# Altium PCB ChronomePCBV2.PcbDoc (part 1 of 2)
Units mil, origin at the board's own origin, x right, y up, seen from the top; angles counter-clockwise.
Board outline 8700 x 8700 mil, 2 copper layers (Top Layer, Bottom Layer); 149 components, 168 nets, 771 pads, 312 vias.
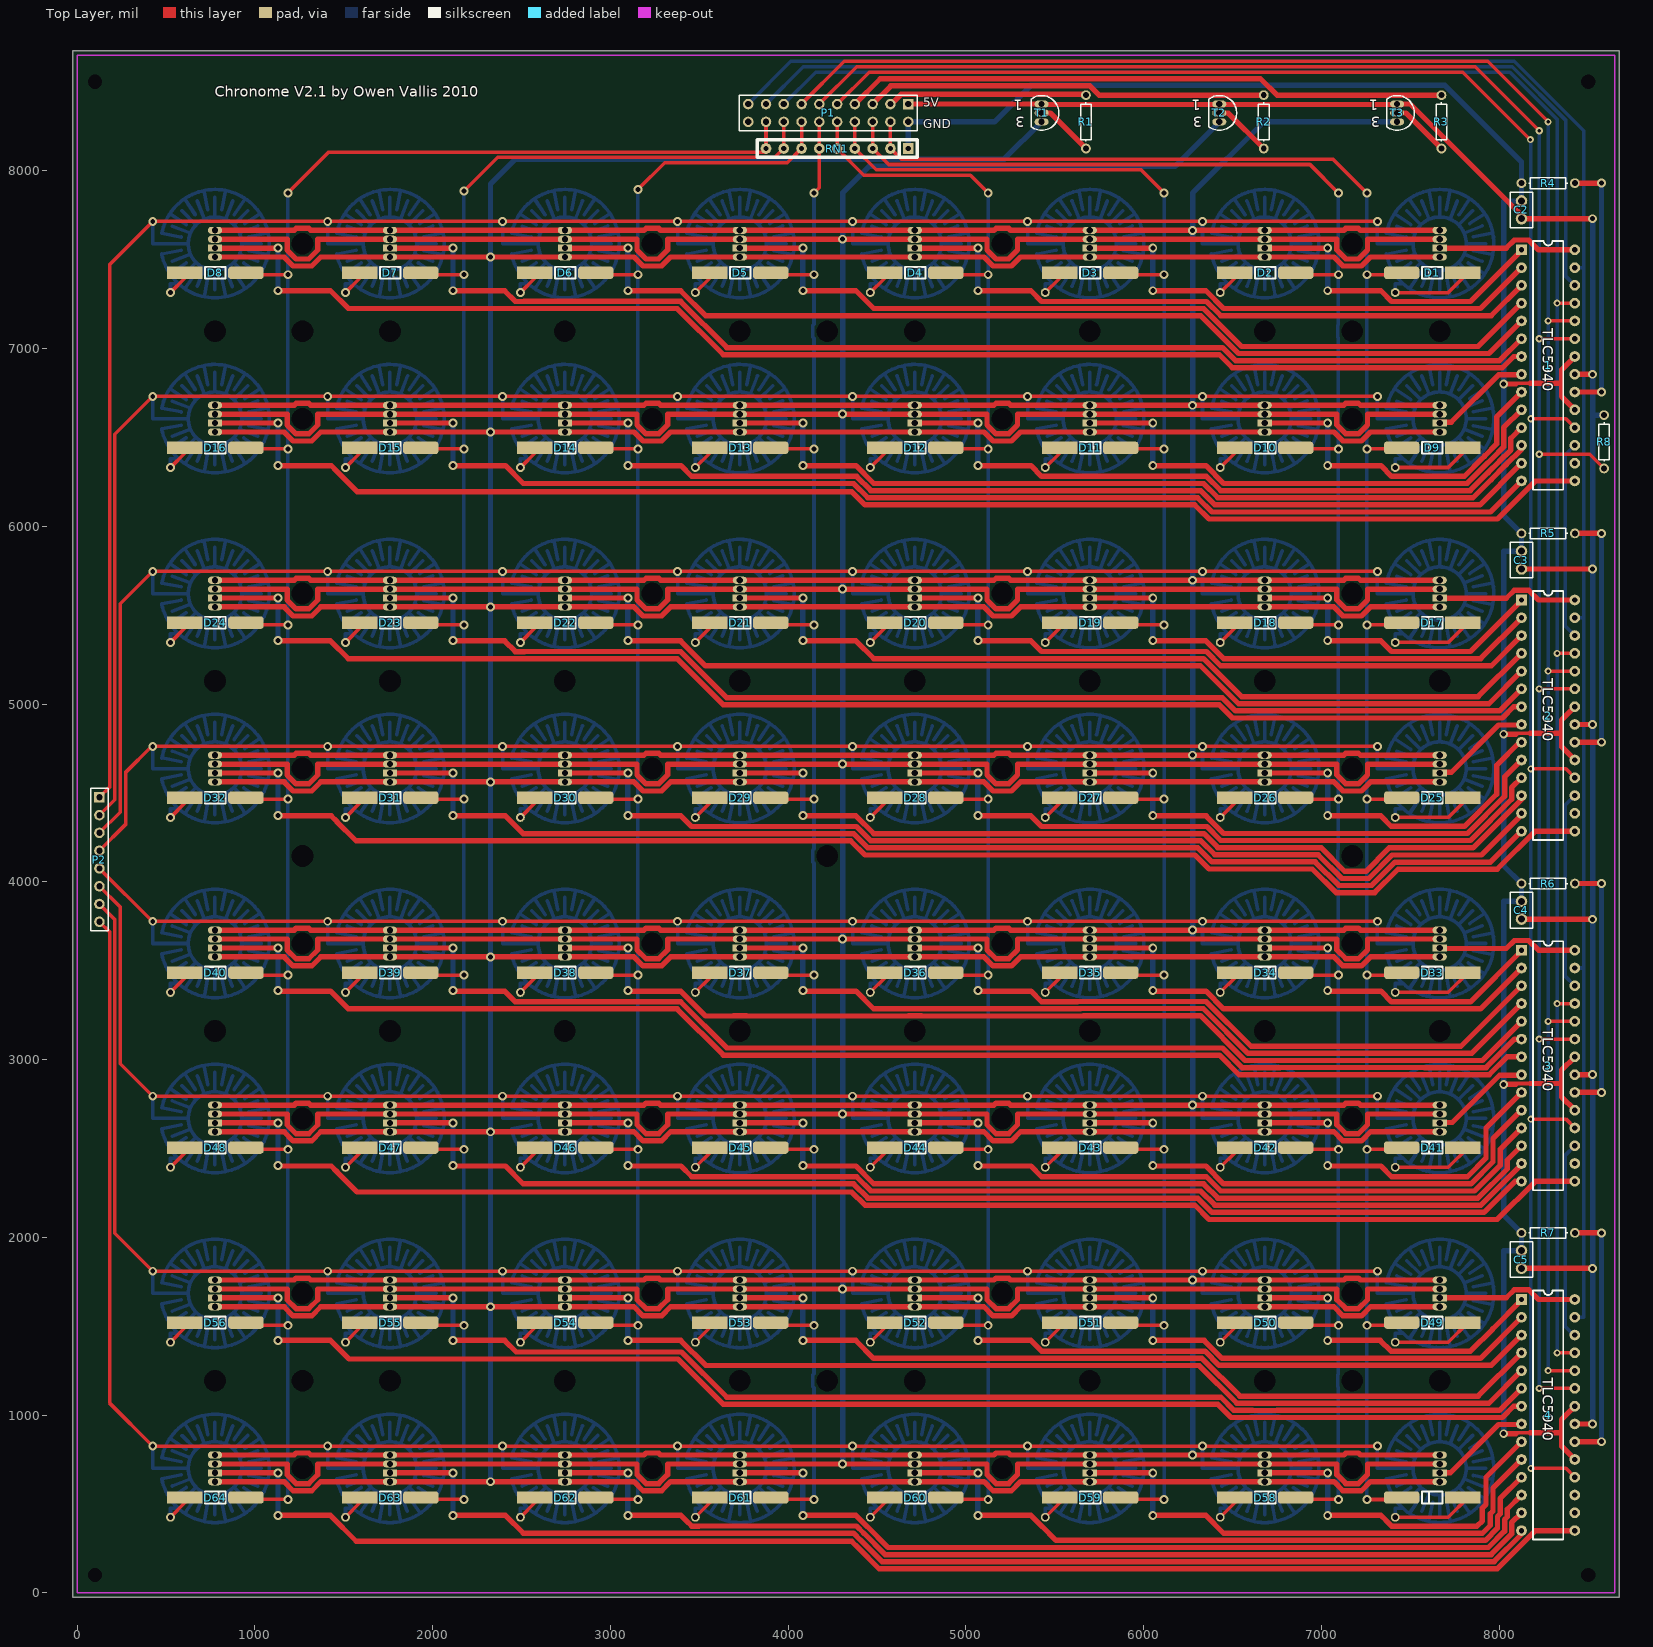
[diagram p0: Top Layer view]
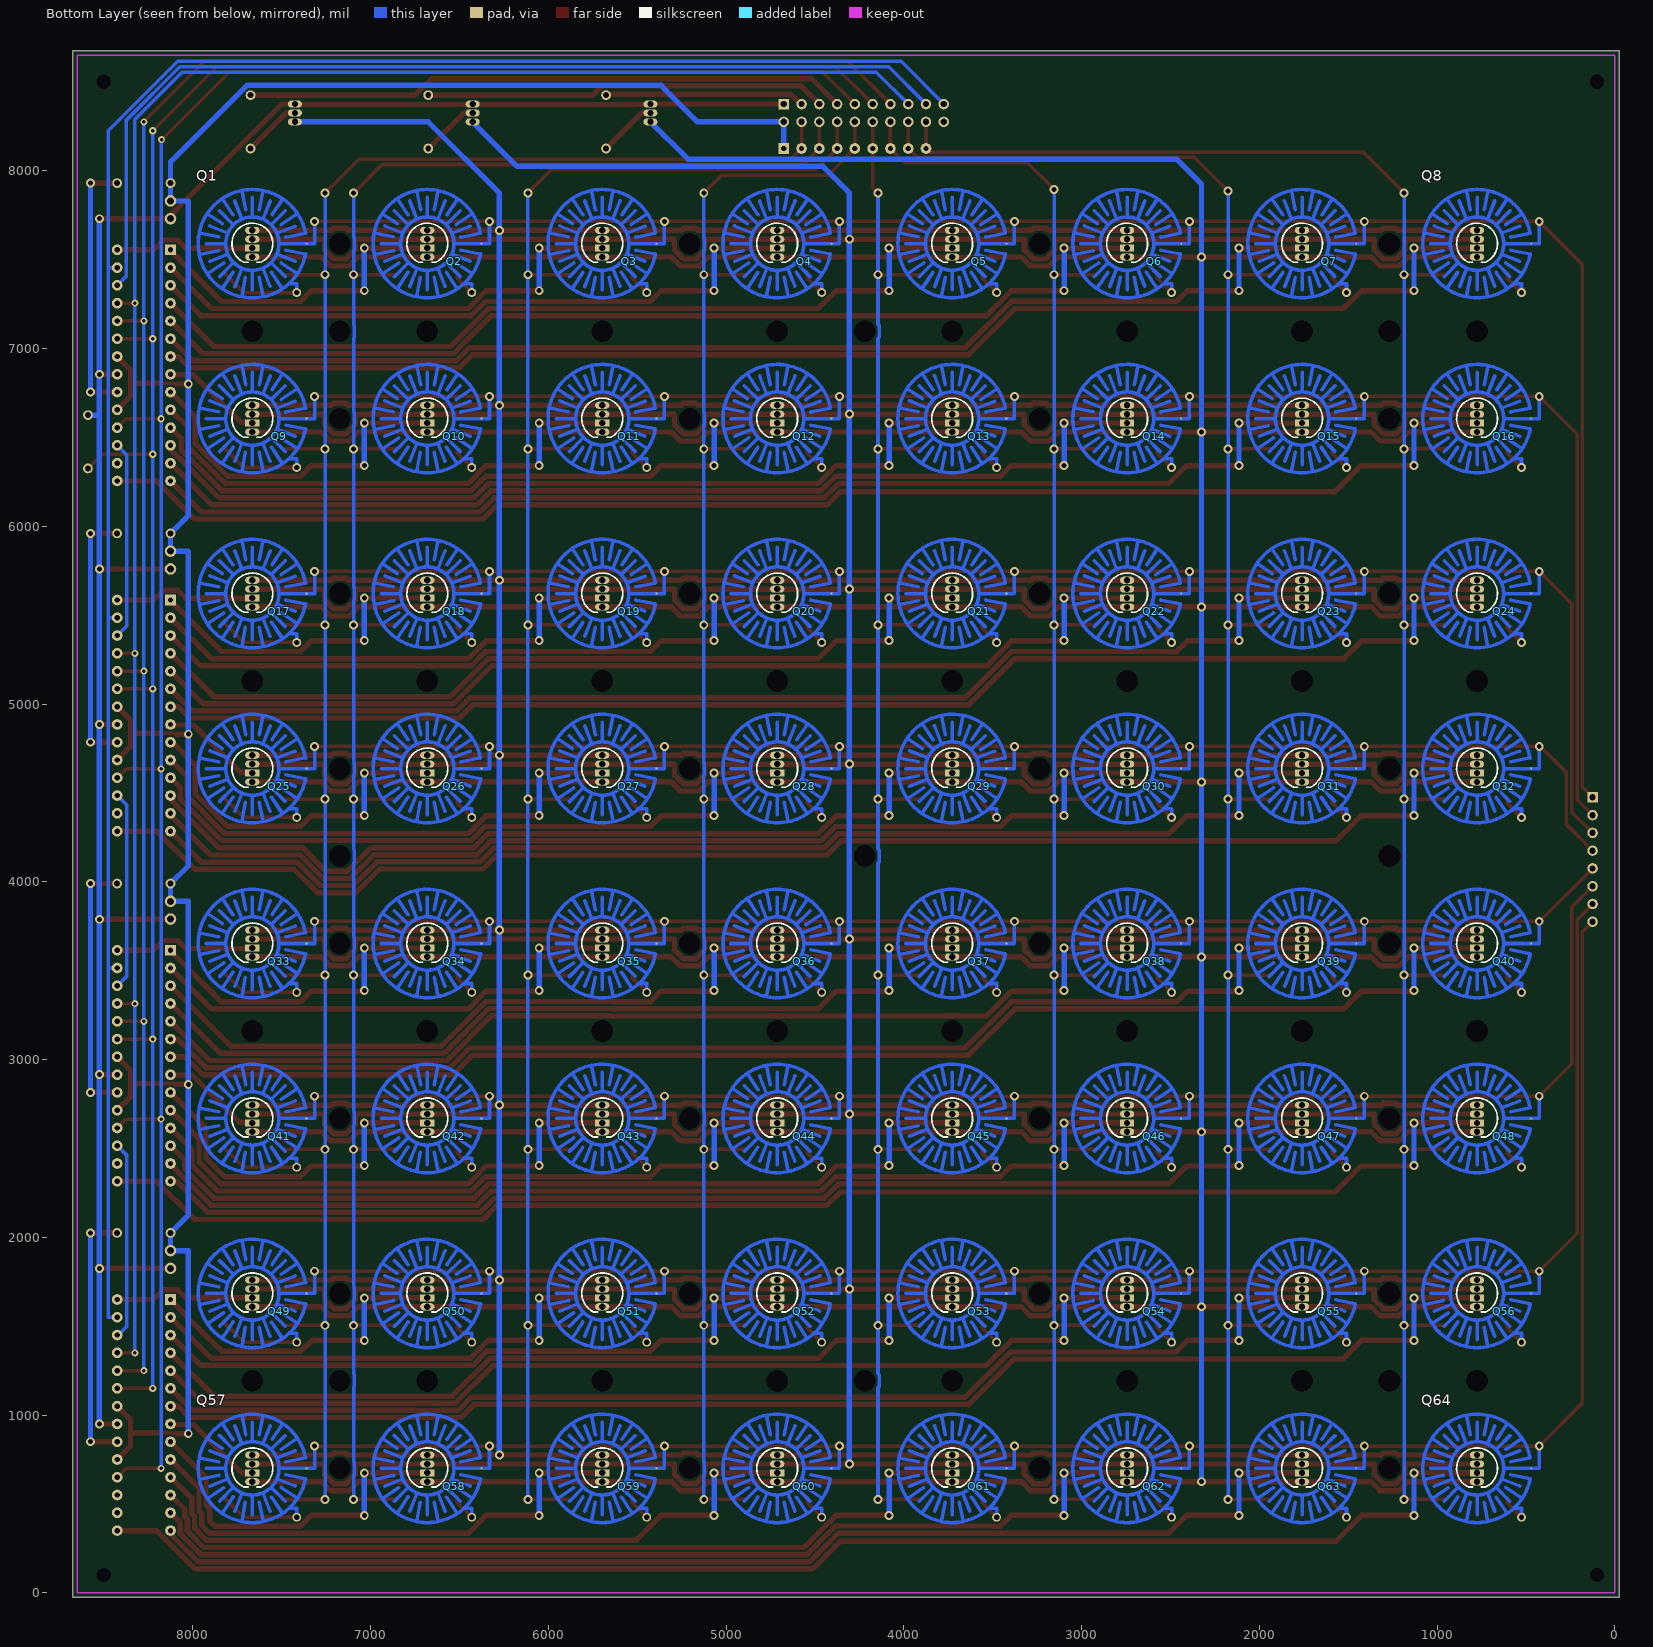
[diagram p1: Bottom Layer view, seen from below]

## Layer stack, top to bottom
Top Layer: signal copper 1.4
Dielectric: dielectric 12.6, FR-4, Dk 4.8
Bottom Layer: signal copper 1.4

## Board outline
-25,-25 8675,-25 8675,8675 -25,8675

## Design rules (kind name [scope] priority, off if disabled: settings)
Clearance [All] p1: gap=10
HoleSize [All] p1: absolutevalues=TRUE maxlimit=157.48 minlimit=1 maxpercent=80.000 minpercent=20.000
NetAntennae NetAntennae_PushButton [(HasFootprint('RGB_PUSHBUTTONV3'))] p1: netantennaetolerance=8700
NetAntennae [All] p2: netantennaetolerance=0
PolygonConnect [All] p1: connectstyle=Relief reliefconductorwidth=10 reliefentries=4 polygonreliefangle="90 Angle"
RoutingVias [All] p1: holewidth=32 width=45 viastyle="Through Hole" minholewidth=20 minwidth=40 maxholewidth=28 maxwidth=50
SilkscreenOverComponentPads [All] p1: minsilkscreentomaskgap=10
SolderMaskExpansion [All] p1: expansion=4
Width Width_RGBTraces [(InNet('BLUE') AND InNet('GREEN') AND InNet('RED'))] p1: maxlimit=50 minlimit=20 preferedwidth=25
Width [All] p2: maxlimit=50 minlimit=15 preferedwidth=15
25 further rules are at their usual default settings.

## Components (designator, comment, footprint, x,y, rotation, side; value= is the part's Value field where it differs from the comment)
1 "TLC5940" TLC5940V1 8125,7555 r0 top
2 "TLC5940" TLC5940V1 8125,5585 r0 top
3 "TLC5940" TLC5940V1 8125,3615 r0 top
4 "TLC5940" TLC5940V1 8125,1650 r0 top
C2 "Cap" CAPR2.54-5.1x3.2 8125,7780 r90 top
C3 "Cap" CAPR2.54-5.1x3.2 8125,5810 r90 top
C4 "Cap" CAPR2.54-5.1x3.2 8125,3840 r90 top
C5 "Cap" CAPR2.54-5.1x3.2 8125,1875 r90 top
D1 "DIODE" DIODESM 7625,7386.76 r180 top
D2 "DIODE" DIODESM 6680.51,7464.76 r0 top
D3 "DIODE" DIODESM 5696.26,7464.76 r0 top
D4 "DIODE" DIODESM 4712.01,7464.76 r0 top
D5 "DIODE" DIODESM 3727.76,7464.76 r0 top
D6 "DIODE" DIODESM 2743.5,7464.76 r0 top
D7 "DIODE" DIODESM 1759.25,7464.76 r0 top
D8 "DIODE" DIODESM 775,7464.76 r0 top
D9 "DIODE" DIODESM 7625,6402.51 r180 top
D10 "DIODE" DIODESM 6680.51,6480.51 r0 top
D11 "DIODE" DIODESM 5696.26,6480.51 r0 top
D12 "DIODE" DIODESM 4712.01,6480.51 r0 top
D13 "DIODE" DIODESM 3727.76,6480.51 r0 top
D14 "DIODE" DIODESM 2743.5,6480.51 r0 top
D15 "DIODE" DIODESM 1759.25,6480.51 r0 top
D16 "DIODE" DIODESM 775,6480.51 r0 top
D17 "DIODE" DIODESM 7625,5418.26 r180 top
D18 "DIODE" DIODESM 6680.51,5496.26 r0 top
D19 "DIODE" DIODESM 5696.26,5496.26 r0 top
D20 "DIODE" DIODESM 4712.01,5496.26 r0 top
D21 "DIODE" DIODESM 3727.76,5496.26 r0 top
D22 "DIODE" DIODESM 2743.5,5496.26 r0 top
D23 "DIODE" DIODESM 1759.25,5496.26 r0 top
D24 "DIODE" DIODESM 775,5496.26 r0 top
D25 "DIODE" DIODESM 7625,4434.01 r180 top
D26 "DIODE" DIODESM 6680.51,4512.01 r0 top
D27 "DIODE" DIODESM 5696.26,4512.01 r0 top
D28 "DIODE" DIODESM 4712.01,4512.01 r0 top
D29 "DIODE" DIODESM 3727.76,4512.01 r0 top
D30 "DIODE" DIODESM 2743.5,4512.01 r0 top
D31 "DIODE" DIODESM 1759.25,4512.01 r0 top
D32 "DIODE" DIODESM 775,4512.01 r0 top
D33 "DIODE" DIODESM 7625,3449.76 r180 top
D34 "DIODE" DIODESM 6680.51,3527.76 r0 top
D35 "DIODE" DIODESM 5696.26,3527.76 r0 top
D36 "DIODE" DIODESM 4712.01,3527.76 r0 top
D37 "DIODE" DIODESM 3727.76,3527.76 r0 top
D38 "DIODE" DIODESM 2743.5,3527.76 r0 top
D39 "DIODE" DIODESM 1759.25,3527.76 r0 top
D40 "DIODE" DIODESM 775,3527.76 r0 top
D41 "DIODE" DIODESM 7625,2465.5 r180 top
D42 "DIODE" DIODESM 6680.51,2543.5 r0 top
D43 "DIODE" DIODESM 5696.26,2543.5 r0 top
D44 "DIODE" DIODESM 4712.01,2543.5 r0 top
D45 "DIODE" DIODESM 3727.76,2543.5 r0 top
D46 "DIODE" DIODESM 2743.5,2543.5 r0 top
D47 "DIODE" DIODESM 1759.25,2543.5 r0 top
D48 "DIODE" DIODESM 775,2543.5 r0 top
D49 "DIODE" DIODESM 7625,1481.25 r180 top
D50 "DIODE" DIODESM 6680.51,1559.25 r0 top
D51 "DIODE" DIODESM 5696.26,1559.25 r0 top
D52 "DIODE" DIODESM 4712.01,1559.25 r0 top
D53 "DIODE" DIODESM 3727.76,1559.25 r0 top
D54 "DIODE" DIODESM 2743.5,1559.25 r0 top
D55 "DIODE" DIODESM 1759.25,1559.25 r0 top
D56 "DIODE" DIODESM 775,1559.25 r0 top
D58 "DIODE" DIODESM 6680.51,575 r0 top
D59 "DIODE" DIODESM 5696.26,575 r0 top
D60 "DIODE" DIODESM 4712.01,575 r0 top
D61 "DIODE" DIODESM 3727.76,575 r0 top
D62 "DIODE" DIODESM 2743.5,575 r0 top
D63 "DIODE" DIODESM 1759.25,575 r0 top
D64 "DIODE" DIODESM 775,575 r0 top
P1 "Header 10X2A" HDR2X10_CEN 4675,8375 r180 top
P2 "Header 8" HDR1X8 125,4475 r270 top
Q1 "PB-LEDSW" RGB_PUSHBUTTONV3 7664.76,7664.76 r180 bottom
Q2 "PB-LEDSW" RGB_PUSHBUTTONV3 6680.51,7664.76 r180 bottom
Q3 "PB-LEDSW" RGB_PUSHBUTTONV3 5696.26,7664.76 r180 bottom
Q4 "PB-LEDSW" RGB_PUSHBUTTONV3 4712.01,7664.76 r180 bottom
Q5 "PB-LEDSW" RGB_PUSHBUTTONV3 3727.76,7664.76 r180 bottom
Q6 "PB-LEDSW" RGB_PUSHBUTTONV3 2743.5,7664.76 r180 bottom
Q7 "PB-LEDSW" RGB_PUSHBUTTONV3 1759.25,7664.76 r180 bottom
Q8 "PB-LEDSW" RGB_PUSHBUTTONV3 775,7664.76 r180 bottom
Q9 "PB-LEDSW" RGB_PUSHBUTTONV3 7664.76,6680.51 r180 bottom
Q10 "PB-LEDSW" RGB_PUSHBUTTONV3 6680.51,6680.51 r180 bottom
Q11 "PB-LEDSW" RGB_PUSHBUTTONV3 5696.26,6680.51 r180 bottom
Q12 "PB-LEDSW" RGB_PUSHBUTTONV3 4712.01,6680.51 r180 bottom
Q13 "PB-LEDSW" RGB_PUSHBUTTONV3 3727.76,6680.51 r180 bottom
Q14 "PB-LEDSW" RGB_PUSHBUTTONV3 2743.5,6680.51 r180 bottom
Q15 "PB-LEDSW" RGB_PUSHBUTTONV3 1759.25,6680.51 r180 bottom
Q16 "PB-LEDSW" RGB_PUSHBUTTONV3 775,6680.51 r180 bottom
Q17 "PB-LEDSW" RGB_PUSHBUTTONV3 7664.76,5696.26 r180 bottom
Q18 "PB-LEDSW" RGB_PUSHBUTTONV3 6680.51,5696.26 r180 bottom
Q19 "PB-LEDSW" RGB_PUSHBUTTONV3 5696.26,5696.26 r180 bottom
Q20 "PB-LEDSW" RGB_PUSHBUTTONV3 4712.01,5696.26 r180 bottom
Q21 "PB-LEDSW" RGB_PUSHBUTTONV3 3727.76,5696.26 r180 bottom
Q22 "PB-LEDSW" RGB_PUSHBUTTONV3 2743.5,5696.26 r180 bottom
Q23 "PB-LEDSW" RGB_PUSHBUTTONV3 1759.25,5696.26 r180 bottom
Q24 "PB-LEDSW" RGB_PUSHBUTTONV3 775,5696.26 r180 bottom
Q25 "PB-LEDSW" RGB_PUSHBUTTONV3 7664.76,4712.01 r180 bottom
Q26 "PB-LEDSW" RGB_PUSHBUTTONV3 6680.51,4712.01 r180 bottom
Q27 "PB-LEDSW" RGB_PUSHBUTTONV3 5696.26,4712.01 r180 bottom
Q28 "PB-LEDSW" RGB_PUSHBUTTONV3 4712.01,4712.01 r180 bottom
Q29 "PB-LEDSW" RGB_PUSHBUTTONV3 3727.76,4712.01 r180 bottom
Q30 "PB-LEDSW" RGB_PUSHBUTTONV3 2743.5,4712.01 r180 bottom
Q31 "PB-LEDSW" RGB_PUSHBUTTONV3 1759.25,4712.01 r180 bottom
Q32 "PB-LEDSW" RGB_PUSHBUTTONV3 775,4712.01 r180 bottom
Q33 "PB-LEDSW" RGB_PUSHBUTTONV3 7664.76,3727.76 r180 bottom
Q34 "PB-LEDSW" RGB_PUSHBUTTONV3 6680.51,3727.76 r180 bottom
Q35 "PB-LEDSW" RGB_PUSHBUTTONV3 5696.26,3727.76 r180 bottom
Q36 "PB-LEDSW" RGB_PUSHBUTTONV3 4712.01,3727.76 r180 bottom
Q37 "PB-LEDSW" RGB_PUSHBUTTONV3 3727.76,3727.76 r180 bottom
Q38 "PB-LEDSW" RGB_PUSHBUTTONV3 2743.5,3727.76 r180 bottom
Q39 "PB-LEDSW" RGB_PUSHBUTTONV3 1759.25,3727.76 r180 bottom
Q40 "PB-LEDSW" RGB_PUSHBUTTONV3 775,3727.76 r180 bottom
Q41 "PB-LEDSW" RGB_PUSHBUTTONV3 7664.76,2743.5 r180 bottom
Q42 "PB-LEDSW" RGB_PUSHBUTTONV3 6680.51,2743.5 r180 bottom
Q43 "PB-LEDSW" RGB_PUSHBUTTONV3 5696.26,2743.5 r180 bottom
Q44 "PB-LEDSW" RGB_PUSHBUTTONV3 4712.01,2743.5 r180 bottom
Q45 "PB-LEDSW" RGB_PUSHBUTTONV3 3727.76,2743.5 r180 bottom
Q46 "PB-LEDSW" RGB_PUSHBUTTONV3 2743.5,2743.5 r180 bottom
Q47 "PB-LEDSW" RGB_PUSHBUTTONV3 1759.25,2743.5 r180 bottom
Q48 "PB-LEDSW" RGB_PUSHBUTTONV3 775,2743.5 r180 bottom
Q49 "PB-LEDSW" RGB_PUSHBUTTONV3 7664.76,1759.25 r180 bottom
Q50 "PB-LEDSW" RGB_PUSHBUTTONV3 6680.51,1759.25 r180 bottom
Q51 "PB-LEDSW" RGB_PUSHBUTTONV3 5696.26,1759.25 r180 bottom
Q52 "PB-LEDSW" RGB_PUSHBUTTONV3 4712.01,1759.25 r180 bottom
Q53 "PB-LEDSW" RGB_PUSHBUTTONV3 3727.76,1759.25 r180 bottom
Q54 "PB-LEDSW" RGB_PUSHBUTTONV3 2743.5,1759.25 r180 bottom
Q55 "PB-LEDSW" RGB_PUSHBUTTONV3 1759.25,1759.25 r180 bottom
Q56 "PB-LEDSW" RGB_PUSHBUTTONV3 775,1759.25 r180 bottom
Q57 "PB-LEDSW" RGB_PUSHBUTTONV3 7664.76,775 r180 bottom
Q58 "PB-LEDSW" RGB_PUSHBUTTONV3 6680.51,775 r180 bottom
Q59 "PB-LEDSW" RGB_PUSHBUTTONV3 5696.26,775 r180 bottom
Q60 "PB-LEDSW" RGB_PUSHBUTTONV3 4712.01,775 r180 bottom
Q61 "PB-LEDSW" RGB_PUSHBUTTONV3 3727.76,775 r180 bottom
Q62 "PB-LEDSW" RGB_PUSHBUTTONV3 2743.5,775 r180 bottom
Q63 "PB-LEDSW" RGB_PUSHBUTTONV3 1759.25,775 r180 bottom
Q64 "PB-LEDSW" RGB_PUSHBUTTONV3 775,775 r180 bottom
R1 "Res1" AXIAL-0.3 5675,8275 r270 top
R2 "Res1" AXIAL-0.3 6675,8275 r270 top
R3 "Res1" AXIAL-0.3 7675,8275 r270 top
R4 "Res1" AXIAL-0.3 8275,7930 r180 top
R5 "Res1" AXIAL-0.3 8275,5960 r180 top
R6 "Res1" AXIAL-0.3 8275,3990 r180 top
R7 "Res1" AXIAL-0.3 8275,2025 r180 top
R8 "Res1" AXIAL-0.3 8590,6475 r270 top
RN1 "100K" "9-Pin Resistor Network" 4675,8125 r270 top
T1 "PN2907A" TO-92A 5425,8325 r180 top
T2 "PN2907A" TO-92A 6425,8325 r180 top
T3 "PN2907A" TO-92A 7425,8325 r180 top

## Footprints (in the part's own frame and the unit in brackets; to place one, negate y for a bottom-side part, rotate by r counter-clockwise, add the part's x,y. Pads: shape width x height; smd on the part's side, far side on the other; paste and mask are expansions set on the pad)
"9-Pin Resistor Network" [mil] "9-Pin Resistor Network"
  rect 60x60 hole 30: 0(0,0)
  round 60 hole 30: 1(0,-100) 2(0,-200) 3(0,-300) 4(0,-400) 5(0,-500) 6(0,-600) 7(0,-700) 8(0,-800)
  silkscreen extent -50,-850 50,50
AXIAL-0.3 [mm] "Axial Device, Thru-Hole; 2 Leads; 0.3 in Pin Spacing"
  round 1.4 hole 0.85: 1(-3.81,0) 2(3.81,0)
  silkscreen extent -2.77,-0.76 2.77,0.76
CAPR2.54-5.1x3.2 [mm] "Capacitor, Ceramic, Thru-Hole, Dipped Radial; Body 5.1 x 3.2 mm (WxT) Pin Spacing 2.54 mm (typ)"
  round 1.65 hole 1: 1(-1.27,0) 2(1.27,0)
  silkscreen extent -2.55,-1.6 2.55,1.6
DIODESM [mil]
  rect 200x70 smd: 0(-169,-39)
  rrect50% 200x70 smd: 1(174,-39)
  silkscreen extent -55,-72 60,-6
HDR1X8 [mm] "Connector; Header; 8 Position"
  rect 1.5x1.5 hole 0.9: 1(0,0)
  round 1.5 hole 0.9: 2(2.54,0) 3(5.08,0) 4(7.62,0) 5(10.16,0) 6(12.7,0) 7(15.24,0) 8(17.78,0)
  silkscreen extent -1.27,-1.27 19.05,1.27
HDR2X10_CEN [mm] "Connector; Header; 10x2 Position"
  rect 1.5x1.5 hole 0.9: 1(0,0)
  round 1.5 hole 0.9: 2(2.54,0) 3(5.08,0) 4(7.62,0) 5(10.16,0) 6(12.7,0) 7(15.24,0) 8(17.78,0) 9(20.32,0) 10(22.86,0) 11(0,2.54) 12(2.54,2.54) 13(5.08,2.54) 14(7.62,2.54) 15(10.16,2.54) 16(12.7,2.54) 17(15.24,2.54) 18(17.78,2.54) 19(20.32,2.54) 20(22.86,2.54)
  silkscreen extent -1.27,-1.27 24.13,3.81
RGB_PUSHBUTTONV3 [mil] "RGB_PushButton"
  oval 80x40 hole 35: 0(0,-150) 2(0,-50) 3(0,0)
  rect 80x40 hole 35: 1(0,-100)
  rect 9.84x9.84 smd mask+0: In(305,-75)
  round 50 hole 30: Out(250,-350)
  Top Layer circle w20: c0,-75 r150
  Top Layer lines w20: 350,50 350,-75 305,-75 150,-75 ; 299.4,-133.16 188.78,-111.16 ; 299.41,-133.1 cw(c0,-75) 299.17,-15.64 ; 299.17,-15.63 188.54,-37.64 ; 251.97,92.06 162.03,31.96 ; 250,-350 250,-300 210,-300 ; 246.92,-239.62 161.6,-182.61 ; 240.62,23.37 140,-15 ; 240.3,-174.23 140,-135 ; 185.46,109.46 110,35 ; 184.93,-260.07 110,-185 ; 169.49,175.34 110.93,87.7 ; 162.59,-318.38 107.84,-236.45 ; 100,165 60,65 ; 99.74,-315.1 60,-215 ; 59.5,215.1 39.6,115.08 ; 58.39,-360.83 39.35,-265.13 ; 0,-335 0,-225 ; 0,185 0,75 ; -37.98,115.4 -57.88,215.42 ; -38.7,-265.26 -57.89,-361.75 ; -57.84,-213.95 -97.76,-315.88 ; -60,65 -99.27,165.28 ; -107.85,86.44 -167.95,176.37 ; -108.6,-235.94 -162.75,-316.99 ; -110,-185 -184.53,-260.53 ; -110,35 -185.07,109.93 ; -140,-135 -240,-175 ; -140,-15 -240.09,24.76 ; -160.85,-183.73 -246.17,-240.73 ; -168.51,37.24 -251.53,92.71 ; -190,-114.98 -290.02,-134.87 ; -190.38,-36.89 -290.4,-17 ; -260,-75 -150,-75 ; 150,-75 ccw(c0,-75) 0,75 ; 150,-75 cw(c0,-75) 0,-225 ; 0,-225 cw(c0,-75) -150,-75 ; 0,75 ccw(c0,-75) -150,-75
  silkscreen extent -115,-180 115,40
TLC5940V1 [mil] "TLC5940V1"
  rect 60x60 hole 30: 1(0,0)
  round 60 hole 30: 2(0,-100) 3(0,-200) 4(0,-300) 5(0,-400) 6(0,-500) 7(0,-600) 8(0,-700) 9(0,-800) 10(0,-900) 11(0,-1000) 12(0,-1100) 13(0,-1200) 14(0,-1300) 15(300,-1300) 16(300,-1200) 17(300,-1100) 18(300,-1000) 19(300,-900) 20(300,-800) 21(300,-700) 22(300,-600) 23(300,-500) 24(300,-400) 25(300,-300) 26(300,-200) 27(300,-100) 28(300,0)
  silkscreen extent 65,-1350 235,50
TO-92A [mm] "TO, Flat Index; 3 In-Line, Axial Leads; Body Dia. 4.5mm; Leads 0.51 x 0.48 mm (max)"
  oval 2x1 hole 0.9: 1(0,-1.27) 2(0,0) 3(0,1.27)
  silkscreen extent -2.48,-2.48 1.5,2.48

## Part data
C2 C3 C4 C5: "Capacitor"
P1: "Header, 10-Pin, Dual row"
P2: "Header, 8-Pin"
Q1 Q2 Q3 Q4 Q5 Q6 Q7 Q8 Q9 Q10 Q11 Q12 Q13 Q14 Q15 Q16 Q17 Q18 Q19 Q20 Q21 Q22 Q23 Q24 Q25 Q26 Q27 Q28 Q29 Q30 Q31 Q32 Q33 Q34 Q35 Q36 Q37 Q38 Q39 Q40 Q41 Q42 Q43 Q44 Q45 Q46 Q47 Q48 Q49 Q50 Q51 Q52 Q53 Q54 Q55 Q56 Q57 Q58 Q59 Q60 Q61 Q62 Q63 Q64: library part "Push Button", "Push Button RGB LED"
R1 R2 R3 R4 R5 R6 R7 R8: "Resistor"
RN1: library part Res1
T1 T2 T3: "PNP General Purpose Amplifier"

## Free pads (board coordinates)
  round 0 hole 122.05: 0(775,3160.63) 0(775,5129.13) 0(775,7097.64) 0(1267.13,700) 0(1267.13,1684.25) 0(1267.13,2668.5) 0(1267.13,3652.76) 0(1267.13,4637.01) 0(1267.13,5621.26) 0(1267.13,6605.51) 0(1267.13,7589.76) 1(775,1192.13) 1(1759.25,1192.13) 1(1759.25,3160.63) 1(1759.25,5129.13) 1(1759.25,7097.64) 1(2743.5,1192) 1(3235.63,700) 1(3235.63,1684.25) 1(3235.63,2668.5) 1(3235.63,3652.76) 1(3235.63,4637.01) 1(3235.63,5621.26) 1(3235.63,6605.51) 1(3235.63,7589.76) 2(1267.13,1192.13) 2(1267.13,4144.88) 2(1267.13,7097.64) 2(2743.5,3160.63) 2(2743.5,5129.13) 2(2743.5,7097.64) 2(4712.01,1192) 2(4712.01,3160.5) 2(4712.01,5129.01) 2(4712.01,7097.51) 2(5204.13,700) 2(5204.13,1684.25) 2(5204.13,2668.5) 2(5204.13,3652.76) 2(5204.13,4637.01) 2(5204.13,5621.26) 2(5204.13,6605.51) 2(5204.13,7589.76) 3(3727.76,1192.13) 3(3727.76,3160.63) 3(3727.76,5129.13) 3(3727.76,7097.64) 3(4219.88,1192.13) 3(4219.88,4144.88) 3(4219.88,7097.64) 3(6680.51,1192) 3(6680.51,3160.5) 3(6680.51,5129.01) 3(6680.51,7097.51) 3(7172.64,700) 3(7172.64,1684.25) 3(7172.64,2668.5) 3(7172.64,3652.76) 3(7172.64,4637.01) 3(7172.64,5621.26) 3(7172.64,6605.51) 3(7172.64,7589.76) 4(7172.64,1192.13) 4(7172.64,4144.88) 4(7172.64,7097.64) 5(5696.26,1192.13) 5(5696.26,3160.63) 5(5696.26,5129.13) 5(5696.26,7097.64) 7(7664.76,1192.13) 7(7664.76,3160.63) 7(7664.76,5129.13) 7(7664.76,7097.64)
  rect 200x70 smd: 0(7794,536)
  round 0 hole 80: 1(100,100) 1(100,8500) 1(8500,100) 1(8500,8500)
  rrect50% 200x70 smd: 1(7451,536)

## Via types
v1: diameter 50, hole 28, Top Layer to Bottom Layer, 292 vias
v2: diameter 40, hole 20, Top Layer to Bottom Layer, 20 vias

## Nets (pads, with @x,y where several pads share a name; then routed paths per layer and width w, separated by ;. In a path a pad name is that pad's centre, name@x,y a point inside that pad or via, vN(x,y) a via of type N, cw(c..) or ccw(c..) an arc to the next point about the centre after c; other vN are vias at no path point)
BLANK: 1.23 2.23 3.23 4.23 P1.6 R8.2 | length 12555.1
  Top Layer w20: P1.6@4175,8375 4385,8585 7865,8585 v2(8225,8225) ; v2(8225,1150) 4.23@8425,1150 ; v2(8225,3115) 3.23@8425,3115 ; v2(8225,5085) 2.23@8425,5085 ; v2(8225,6405) 8510,6405 8580,6335 R8.2@8580,6325 ; v2(8225,7055) 1.23@8425,7055
  Bottom Layer w20: v2(8225,1150) v2(8225,8225)
BLUE: P1.3 R2.1 | length 2264.3
  Top Layer w30: P1.3@4475,8375 4577.56,8477.56 5696.77,8477.56 5749.33,8425 R2.1@6675,8425
COL1: D1.1 D9.1 D17.1 D25.1 D33.1 D41.1 D49.1 P1.12 pad.1@7451,536 RN1.1 | length 12153.6
  Top Layer w20: P1.12@4575,8275 RN1.1@4575,8125 4635,8065 7065,8065 v1(7255,7875) ; v1@7260,525 pad.1@7495,525 ; v1@7260,1505 D49.1@7495,1505 ; v1@7260,2495 D41.1@7495,2495 ; v1@7260,3475 D33.1@7495,3475 ; v1@7260,4465 D25.1@7495,4465 ; v1@7260,5445 D17.1@7495,5445 ; v1@7260,6435 D9.1@7495,6435 ; v1@7260,7415 D1.1@7495,7415
  Bottom Layer w20: v1@7255,535 v1(7255,1505) v1(7255,2495) v1(7255,3475) v1(7255,4465) v1(7255,5445) v1(7255,6435) v1(7255,7415) v1(7255,7875)
  other v1: 7255,525
COL2: D2.1 D10.1 D18.1 D26.1 D34.1 D42.1 D50.1 D58.1 P1.13 RN1.2 | length 12124.4
  Top Layer w20: P1.13@4475,8275 RN1.2@4475,8125 4565,8035 6935,8035 v1(7095,7875) ; D50.1@6855,1505 v1@7090,1505 ; D42.1@6855,2495 v1@7090,2495 ; D34.1@6855,3475 v1@7090,3475 ; D26.1@6855,4465 v1@7090,4465 ; D18.1@6855,5445 v1@7090,5445 ; D10.1@6855,6435 v1@7090,6435 ; D2.1@6855,7415 v1@7090,7415 ; D58.1@6859,526 v1@7094,526
  Bottom Layer w20: v1@7095,535 7095,663.05 7091.61,666.44 7091.61,733.56 7095,736.95 7095,1155.18 7091.61,1158.56 7091.61,1225.69 7095,1229.07 v1(7095,1505) 7095,1647.31 7091.61,1650.69 7091.61,1717.81 7095,1721.2 v1(7095,2495) 7095,2631.56 7091.61,2634.94 7091.61,2702.06 7095,2705.45 v1(7095,3475) 7095,3615.81 7091.61,3619.19 7091.61,3686.32 7095,3689.7 7095,4107.94 7091.61,4111.32 7091.61,4178.44 7095,4181.83 v1(7095,4465) 7095,4600.06 7091.61,4603.45 7091.61,4670.57 7095,4673.95 v1(7095,5445) 7095,5584.31 7091.61,5587.7 7091.61,5654.82 7095,5658.21 v1(7095,6435) 7095,6568.57 7091.61,6571.95 7091.61,6639.07 7095,6642.46 7095,7060.69 7091.61,7064.08 7091.61,7131.2 7095,7134.58 v1(7095,7415) 7095,7552.82 7091.61,7556.2 7091.61,7623.33 7095,7626.71 v1(7095,7875)
  other v1: 7095,525
COL3: D3.1 D11.1 D19.1 D27.1 D35.1 D43.1 D51.1 D59.1 P1.14 RN1.3 | length 11213.6
  Top Layer w20: P1.14@4375,8275 RN1.3@4375,8125 4495,8005 5985,8005 v1(6115,7875) ; D51.1@5875,1505 v1@6110,1505 ; D43.1@5875,2495 v1@6110,2495 ; D35.1@5875,3475 v1@6110,3475 ; D27.1@5875,4465 v1@6110,4465 ; D19.1@5875,5445 v1@6110,5445 ; D11.1@5875,6435 v1@6110,6435 ; D3.1@5875,7415 v1@6110,7415 ; D59.1@5879,526 v1@6114,526
  Bottom Layer w20: v1@6115,535 v1(6115,1505) v1(6115,2495) v1(6115,3475) v1(6115,4465) v1(6115,5445) v1(6115,6435) v1(6115,7415) v1(6115,7875)
  other v1: 6115,525
COL4: D4.1 D12.1 D20.1 D28.1 D36.1 D44.1 D52.1 D60.1 P1.15 RN1.4 | length 10336.1
  Top Layer w20: P1.15@4275,8275 RN1.4@4275,8125 4425,7975 5025,7975 v1(5125,7875) ; D52.1@4885,1505 v1@5120,1505 ; D44.1@4885,2495 v1@5120,2495 ; D36.1@4885,3475 v1@5120,3475 ; D28.1@4885,4465 v1@5120,4465 ; D20.1@4885,5445 v1@5120,5445 ; D12.1@4885,6435 v1@5120,6435 ; D4.1@4885,7415 v1@5120,7415 ; D60.1@4889,526 v1@5124,526
  Bottom Layer w20: v1@5125,535 5125,664.55 5123.11,666.44 5123.11,733.56 5125,735.45 v1(5125,1505) 5125,1648.8 5123.11,1650.69 5123.11,1717.81 5125,1719.7 v1(5125,2495) 5125,2633.05 5123.11,2634.94 5123.11,2702.06 5125,2703.95 v1(5125,3475) 5125,3617.31 5123.11,3619.19 5123.11,3686.32 5125,3688.21 v1(5125,4465) 5125,4601.56 5123.11,4603.45 5123.11,4670.57 5125,4672.46 v1(5125,5445) 5125,5585.81 5123.11,5587.7 5123.11,5654.82 5125,5656.71 v1(5125,6435) 5125,6570.06 5123.11,6571.95 5123.11,6639.07 5125,6640.96 v1(5125,7415) 5125,7554.31 5123.11,7556.2 5123.11,7623.33 5125,7625.21 v1(5125,7875)
  other v1: 5125,525
COL5: D5.1 D13.1 D21.1 D29.1 D37.1 D45.1 D53.1 D61.1 P1.16 RN1.5 | length 9657.7
  Top Layer w20: D53.1@3905,1505 v1@4140,1505 ; D45.1@3905,2495 v1@4140,2495 ; D37.1@3905,3475 v1@4140,3475 ; D29.1@3905,4465 v1@4140,4465 ; D21.1@3905,5445 v1@4140,5445 ; D13.1@3905,6435 v1@4140,6435 ; D5.1@3905,7415 v1@4140,7415 ; D61.1@3909,526 v1@4144,526 ; v1(4145,7875) 4175,7905 RN1.5@4175,8125 P1.16@4175,8275
  Bottom Layer w20: v1(4145,525) 4145,1152.42 4138.86,1158.56 4138.86,1225.69 4145,1231.83 v1(4145,1505) v1(4145,2495) v1(4145,3475) 4145,4105.18 4138.86,4111.32 4138.86,4178.44 4145,4184.58 v1(4145,4465) v1(4145,5445) v1(4145,6435) 4145,7057.94 4138.86,7064.08 4138.86,7131.2 4145,7137.34 v1(4145,7415) v1(4145,7875)
COL6: D6.1 D14.1 D22.1 D30.1 D38.1 D46.1 D54.1 D62.1 P1.17 RN1.6 | length 10408.1
  Top Layer w20: D54.1@2915,1505 v1@3150,1505 ; D46.1@2915,2495 v1(3154.61,2495) ; D38.1@2917.5,3475 v1@3150,3475 ; D30.1@2917.5,4465 v1@3150,4465 ; D22.1@2917.5,5445 v1@3150,5445 ; D14.1@2917.5,6435 v1@3150,6435 ; D6.1@2917.5,7415 v1@3150,7415 ; D62.1@2919,526 v1@3154.61,526 ; v1(3155,7895) 3305,8045 3995,8045 RN1.6@4075,8125 P1.17@4075,8275
  Bottom Layer w20: v1(3154.61,525) v1(3154.61,2495) 3154.61,7894.61 v1(3155,7895)
  other v1: 3155,1505 3155,3475 3155,4465 3155,5445 3155,6435 3155,7415
COL7: D7.1 D15.1 D23.1 D31.1 D39.1 D47.1 D55.1 D63.1 P1.18 RN1.7 | length 11289.4
  Top Layer w20: D55.1@1935,1505 v1@2170,1505 ; D47.1@1935,2495 v1@2170,2495 ; D39.1@1935,3475 v1@2170,3475 ; D31.1@1935,4465 v1@2170,4465 ; D23.1@1935,5445 v1@2170,5445 ; D15.1@1935,6435 v1@2170,6435 ; D7.1@1935,7415 v1@2170,7415 ; D63.1@1939,526 v1@2174,526 ; v1(2175,7885) 2365,8075 3925,8075 RN1.7@3975,8125 P1.18@3975,8275
  Bottom Layer w20: v1(2175,525) v1(2175,1505) v1(2175,2495) v1(2175,3475) v1(2175,4465) v1(2175,5445) v1(2175,6435) v1(2175,7415) v1(2175,7885)
COL8: D8.1 D16.1 D24.1 D32.1 D40.1 D48.1 D56.1 D64.1 P1.19 RN1.8 | length 12157.3
  Top Layer w20: D64.1@949,526 v1@1184,526 ; D56.1@949,1505 v1@1180,1505 ; D48.1@949,2495 v1@1180,2495 ; D40.1@949,3475 v1@1180,3475 ; D32.1@949,4465 v1@1180,4465 ; D24.1@949,5445 v1@1180,5445 ; D16.1@949,6435 v1@1180,6435 ; D8.1@949,7415 v1@1180,7415 ; v1(1185,7875) 1415,8105 3875,8105 P1.19@3875,8275
  Bottom Layer w20: v1(1185,525) v1(1185,1505) v1(1185,2495) v1(1185,3475) v1(1185,4465) v1(1185,5445) v1(1185,6435) v1(1185,7415) v1(1185,7875)
GND: 1.19 1.22 2.19 2.22 3.19 3.22 4.19 4.22 C2.2 C3.2 C4.2 C5.2 P1.11 R4.2 R5.2 R6.2 R7.2 RN1.0 | length 14277.9
  Top Layer w20: 8092.22,6800 8097.22,6805 8175,6805 ; 8097.22,900 8175,900 ; 8097.22,2865 8175,2865 ; 8097.22,4835 8175,4835
  Top Layer w30: v1(8025,895) 8092.22,895 ; v1(8025,2860) 8092.22,2860 ; v1(8025,4830) 8092.22,4830 ; v1(8025,6800) 8092.22,6800 ; 8175,900 8350,900 ; 8175,2865 8350,2865 ; 8175,4835 8350,4835 ; 8175,6805 8350,6805 ; 4.19@8425,750 8350,825 8350,900 ; 4.22@8425,1050 8350,975 8350,900 ; 3.19@8425,2715 8350,2790 8350,2865 ; 3.22@8425,3015 8350,2940 8350,2865 ; 2.19@8425,4685 8350,4760 8350,4835 ; 2.22@8425,4985 8350,4910 8350,4835 ; 1.19@8425,6655 8350,6730 8350,6805 ; 1.22@8425,6955 8350,6880 8350,6805
  Bottom Layer w30: RN1.0@4675,8125 P1.11@4675,8275 5160,8275 5365,8480 7695,8480 8125,8050 R4.2@8125,7930 C2.2@8125,7830 8025,7830 v1(8025,6800) 8025,6060 R5.2@8125,5960 C3.2@8125,5860 8025,5860 8025,4090 R6.2@8125,3990 C4.2@8125,3890 8025,3890 8025,2125 R7.2@8125,2025 C5.2@8125,1925 8025,1925 v1(8025,895)
GREEN: P1.4 R3.1 | length 3397.4
  Top Layer w30: P1.4@4375,8375 4517.56,8517.56 6656.77,8517.56 6749.33,8425 R3.1@7675,8425
GSCLK: 1.18 2.18 3.18 4.18 P1.5 | length 12683.8
  Top Layer w20: P1.5@4270,8380 4280,8380 4455,8555 7795,8555 v2(8175,8175) ; v2(8177.48,700) 8375,700 4.18@8425,650 ; v2(8177.48,2665) 8375,2665 3.18@8425,2615 ; v2(8177.48,4635) 8375,4635 2.18@8425,4585 ; v2(8177.48,6605) 8375,6605 1.18@8425,6555
  Bottom Layer w20: v2(8175,8175) 8177.48,8172.52 v2(8177.48,700)
"LED GND 1": 1.28 Q1.1 | length 801.8
  Top Layer w30: Q1.1@7664.76,7564.76 8039.41,7564.76 8084.64,7610 8165.36,7610 8220.36,7555 1.28@8425,7555
"LED GND 2": 1.1 Q2.1 | length 1831.2
  Top Layer w30: Q2.1@6680.51,7564.76 v1(7035,7564.76) ; v1(7035,7325) 7333.82,7325 7394.05,7264.76 7837.87,7264.76 8125,7551.9 1.1@8125,7555
  Bottom Layer w30: v1(7035,7325) v1(7035,7564.76)
"LED GND 3": 1.2 Q3.1 | length 2805.4
  Top Layer w30: Q3.1@5696.26,7564.76 v1(6050.75,7564.76) ; v1(6050.75,7325) 6349.57,7325 6449.8,7224.76 7894.76,7224.76 1.2@8125,7455
  Bottom Layer w30: v1(6050.75,7325) v1(6050.75,7564.76)
"LED GND 4": 1.3 Q4.1 | length 3781.4
  Top Layer w30: Q4.1@4712.01,7564.76 v1(5066.5,7564.76) ; v1(5066.5,7325) 5365.31,7325 5425.55,7264.76 6353.23,7264.76 6433.23,7184.76 7954.76,7184.76 1.3@8125,7355
  Bottom Layer w30: v1(5066.5,7325) v1(5066.5,7564.76)
"LED GND 5": 1.4 Q5.1 | length 4867.7
  Top Layer w30: Q5.1@3727.76,7564.76 v1(4082.24,7564.76) ; v1(4082.24,7325) 4381.06,7325 4481.3,7224.76 6336.66,7224.76 6549.94,7011.49 7881.49,7011.49 1.4@8125,7255
  Bottom Layer w30: v1(4082.24,7325) v1(4082.24,7564.76)
"LED GND 6": 1.5 Q6.1 | length 5843.7
  Top Layer w30: Q6.1@2743.5,7564.76 v1(3097.99,7564.76) ; v1(3097.99,7325) 3395,7325 3536.34,7183.66 6321.2,7183.66 6533.37,6971.49 7941.49,6971.49 1.5@8125,7155
  Bottom Layer w30: v1(3097.99,7325) v1(3097.99,7564.76)
"LED GND 7": 1.6 Q7.1 | length 6819.9
  Top Layer w30: Q7.1@1759.25,7564.76 v1(2113.74,7564.76) ; v1(2113.74,7325) 2405,7325 2465.24,7264.76 2514.21,7264.76 2514.45,7265 3395,7265 3655,7005 6443.29,7005 6516.8,6931.49 8001.49,6931.49 1.6@8125,7055
  Bottom Layer w30: v1(2113.74,7325) v1(2113.74,7564.76)
"LED GND 8": 1.7 Q8.1 | length 7795.8
  Top Layer w30: Q8.1@775,7564.76 v1(1129.49,7564.76) ; v1(1129.49,7325) 1425,7325 1525.24,7224.76 2530.78,7224.76 2531.02,7225 3375,7225 3635,6965 6425,6965 6498.51,6891.49 8018.06,6891.49 8081.57,6955 1.7@8125,6955
  Bottom Layer w30: v1(1129.49,7325) v1(1129.49,7564.76)
"LED GND 9": 1.8 Q9.1 | length 573.9
  Top Layer w30: Q9.1@7664.76,6580.51 7669.76,6585.51 7729.76,6585.51 7995.74,6851.49 8121.49,6851.49 1.8@8125,6855
"LED GND 10": 1.9 Q10.1 | length 1995.3
  Top Layer w30: Q10.1@6680.51,6580.51 v1(7035,6580.51) ; v1(7035,6340.75) 7333.82,6340.75 7394.05,6280.51 7803.02,6280.51 7904.02,6381.51 7904.36,6381.51 7919,6396.16 7919,6396.49 7985,6462.49 7985,6615 1.9@8125,6755
  Bottom Layer w30: v1(7035,6340.75) v1(7035,6580.51)
"LED GND 11": 1.10 Q11.1 | length 2945.8
  Top Layer w30: Q11.1@5696.26,6580.51 v1(6050.75,6580.51) ; v1(6050.75,6340.75) 6349.57,6340.75 6449.8,6240.51 7819.59,6240.51 7920.59,6341.51 7920.92,6341.51 7959,6379.59 7959,6379.92 8025,6445.92 8025,6555 1.10@8125,6655
  Bottom Layer w30: v1(6050.75,6340.75) v1(6050.75,6580.51)
"LED GND 12": 1.11 Q12.1 | length 3896.3
  Top Layer w30: Q12.1@4712.01,6580.51 v1(5066.5,6580.51) ; v1(5066.5,6340.75) 5365.31,6340.75 5425.55,6280.51 6353.23,6280.51 6433.23,6200.51 7836.16,6200.51 7937.16,6301.51 7937.49,6301.51 7999,6363.02 7999,6363.35 8065,6429.35 8065,6495 1.11@8125,6555
  Bottom Layer w30: v1(5066.5,6340.75) v1(5066.5,6580.51)
"LED GND 13": 1.12 Q13.1 | length 4846.9
  Top Layer w30: Q13.1@3727.76,6580.51 v1(4082.24,6580.51) ; v1(4082.24,6340.75) 4381.06,6340.75 4481.3,6240.51 6336.66,6240.51 6416.66,6160.51 7852.73,6160.51 7953.73,6261.51 7954.06,6261.51 8039,6346.45 8039,6346.78 8125,6432.78 1.12@8125,6455
  Bottom Layer w30: v1(4082.24,6340.75) v1(4082.24,6580.51)
"LED GND 14": 1.13 Q14.1 | length 5815.5
  Top Layer w30: Q14.1@2743.5,6580.51 v1(3097.99,6580.51) ; v1(3097.99,6340.75) 3396.81,6340.75 3457.05,6280.51 4384.73,6280.51 4464.73,6200.51 6320.1,6200.51 6400.1,6120.51 7890.51,6120.51 8115,6345 1.13@8135,6345
  Bottom Layer w30: v1(3097.99,6340.75) v1(3097.99,6580.51)
"LED GND 15": 1.14 Q15.1 | length 6785.6
  Top Layer w30: Q15.1@1759.25,6580.51 v1(2113.74,6580.51) ; v1(2113.74,6340.75) 2409.25,6340.75 2509.49,6240.51 4368.16,6240.51 4448.16,6160.51 6303.53,6160.51 6383.53,6080.51 7950.51,6080.51 1.14@8125,6255
  Bottom Layer w30: v1(2113.74,6340.75) v1(2113.74,6580.51)
"LED GND 16": 1.15 Q16.1 | length 8104.5
  Top Layer w30: Q16.1@775,6580.51 v1(1129.49,6580.51) ; v1(1129.49,6340.75) 1429.25,6340.75 1459.25,6310.75 1459.25,6309.8 1574.05,6195 4357.1,6195 4431.59,6120.51 6286.96,6120.51 6366.96,6040.51 7989.92,6040.51 8150,6200.59 8150,6202.22 8202.78,6255 1.15@8425,6255
  Bottom Layer w30: v1(1129.49,6340.75) v1(1129.49,6580.51)
"LED GND 17": 2.28 Q17.1 | length 801.8
  Top Layer w30: Q17.1@7664.76,5594.76 8039.41,5594.76 8084.64,5640 8165.36,5640 8220.36,5585 2.28@8425,5585
"LED GND 18": 2.1 Q18.1 | length 1829.7
  Top Layer w30: Q18.1@6680.51,5596.26 v1(7035,5596.26) ; v1@7035,5355 7333.82,5355 7393.82,5295 7595.84,5295 7595.99,5295.16 7733.53,5295.16 7733.69,5295 7838.1,5295 2.1@8125,5581.9 ; 2.1@8125,5583.39 2.1@8125,5585
  Bottom Layer w30: v1(7035,5356.5) v1(7035,5596.26)
"LED GND 19": 2.2 Q19.1 | length 2805.4
  Top Layer w30: Q19.1@5696.26,5596.26 v1(6050.75,5596.26) ; v1@6050.75,5355 6349.57,5355 6449.57,5255 6628.28,5255 ; 6628.31,5255.03 6732.71,5255.03 ; 6732.74,5255 7612.41,5255 7612.56,5255.16 7716.96,5255.16 7717.12,5255 7895,5255 2.2@8125,5485
  Bottom Layer w30: v1(6050.75,5356.5) v1(6050.75,5596.26)
"LED GND 20": 2.3 Q20.1 | length 3781.4
  Top Layer w30: Q20.1@4712.01,5596.26 v1(5066.5,5596.26) ; v1@5066.5,5355 5365.31,5355 5425.31,5295 5627.33,5295 5627.49,5295.16 6352.84,5295.16 6433,5215 6644.85,5215 ; 6644.88,5215.03 6716.14,5215.03 ; 6716.18,5215 7628.97,5215 7629.13,5215.16 7700.4,5215.16 7700.55,5215 7955,5215 2.3@8125,5385
  Bottom Layer w30: v1(5066.5,5356.5) v1(5066.5,5596.26)
"LED GND 21": 2.4 Q21.1 | length 4867.9
  Top Layer w30: Q21.1@3727.76,5596.26 v1(4082.24,5596.26) ; v1@4082.24,5355 4381.06,5355 4481.06,5255 4659.78,5255 ; 4659.81,5255.03 4764.21,5255.03 ; 4764.24,5255 5643.9,5255 5644.06,5255.16 6336.27,5255.16 6549.94,5041.49 7881.49,5041.49 2.4@8125,5285
  Bottom Layer w30: v1(4082.24,5356.5) v1(4082.24,5596.26)
"LED GND 22": 2.5 Q22.1 | length 5844
  Top Layer w30: Q22.1@2743.5,5596.26 v1(3097.99,5596.26) ; v1@3097.99,5355 3395,5355 3535,5215 3691.97,5215 3692.12,5215.16 3763.39,5215.16 3763.55,5215 4676.34,5215 ; 4676.38,5215.03 4747.64,5215.03 ; 4747.67,5215 5660.47,5215 5660.63,5215.16 6319.7,5215.16 6533.37,5001.49 7941.49,5001.49 2.5@8125,5185
  Bottom Layer w30: v1(3097.99,5356.5) v1(3097.99,5596.26)
"LED GND 23": 2.6 Q23.1 | length 6819.5
  Top Layer w30: Q23.1@1759.25,5596.26 v1(2113.74,5596.26) ; v1@2113.74,5355 2405,5355 2465.24,5294.76 2514.21,5294.76 ; 2514.45,5295 3395,5295 3655,5035 6443.29,5035 6516.8,4961.49 8001.49,4961.49 2.6@8125,5085
  Bottom Layer w30: v1(2113.74,5356.5) v1(2113.74,5596.26)
"LED GND 24": 2.7 Q24.1 | length 7795.8
  Top Layer w30: Q24.1@775,5596.26 v1(1129.49,5596.26) ; v1@1129.49,5355 1425,5355 1525.24,5254.76 2530.78,5254.76 2531.02,5255 3375,5255 3635,4995 6425,4995 6498.51,4921.49 8018.06,4921.49 8081.57,4985 2.7@8125,4985
  Bottom Layer w30: v1(1129.49,5356.5) v1(1129.49,5596.26)
"LED GND 25": 2.8 Q25.1 | length 561.9
  Top Layer w30: Q25.1@7669.76,4615.51 7729.76,4615.51 7995.74,4881.49 2.8@8121.49,4881.49
"LED GND 26": 2.9 Q26.1 | length 1999.7
  Top Layer w30: Q26.1@6680.51,4612.01 v1(7035,4612.01) ; v1@7035,4370.75 7333.82,4370.75 7392.56,4312.01 7804.52,4312.01 7985,4492.49 7985,4655 8115,4785 2.9@8125,4785
  Bottom Layer w30: v1(7035,4372.24) v1(7035,4612.01)
"LED GND 27": 2.10 Q27.1 | length 2944.4
  Top Layer w30: Q27.1@5696.26,4612.01 v1(6050.75,4612.01) ; v1@6050.75,4370.75 6351.06,4370.75 6449.8,4272.01 7821.09,4272.01 8030,4480.92 8030,4590 2.10@8125,4685
  Bottom Layer w30: v1(6050.75,4372.24) v1(6050.75,4612.01)
"LED GND 28": 2.11 Q28.1 | length 3894.9
  Top Layer w30: Q28.1@4712.01,4612.01 v1(5066.5,4612.01) ; v1@5066.5,4370.75 5365.31,4370.75 5425.55,4310.51 6354.73,4310.51 6433.23,4232.01 7837.66,4232.01 8070,4464.35 8070,4530 2.11@8125,4585
  Bottom Layer w30: v1(5066.5,4372.24) v1(5066.5,4612.01)
"LED GND 29": 2.12 Q29.1 | length 4942.8
  Top Layer w30: Q29.1@3727.76,4612.01 v1(4082.24,4612.01) ; v1@4082.24,4370.75 4381.06,4370.75 4481.3,4270.51 6338.16,4270.51 6416.66,4192.01 6997.7,4192.01 7130.85,4058.86 7249.15,4058.86 7380.81,4190.51 7852.73,4190.51 8130,4467.78 2.12@8130,4470
  Bottom Layer w30: v1(4082.24,4372.24) v1(4082.24,4612.01)
"LED GND 30": 2.13 Q30.1 | length 5924.5
  Top Layer w30: Q30.1@2743.5,4612.01 v1(3097.99,4612.01) ; v1@3097.99,4370.75 3396.81,4370.75 3456.65,4310.91 4384.34,4310.91 4464.73,4230.51 6321.59,4230.51 6400.1,4152.01 6981.13,4152.01 7114.28,4018.86 7265.72,4018.86 7397.37,4150.51 7900.51,4150.51 8125,4375 2.13@8125,4385
  Bottom Layer w30: v1(3097.99,4372.24) v1(3097.99,4612.01)
"LED GND 31": 2.14 Q31.1 | length 6894.6
  Top Layer w30: Q31.1@1759.25,4612.01 v1(2113.74,4612.01) ; v1@2113.74,4370.75 2409.25,4370.75 2509.09,4270.91 4367.77,4270.91 4448.16,4190.51 6305.02,4190.51 6383.53,4112.01 6964.56,4112.01 7097.71,3978.86 7282.29,3978.86 7413.94,4110.51 7950.51,4110.51 2.14@8125,4285
  Bottom Layer w30: v1(2113.74,4372.24) v1(2113.74,4612.01)
"LED GND 32": 2.15 Q32.1 | length 8211.6
  Top Layer w30: Q32.1@775,4612.01 v1(1129.49,4612.01) ; v1@1129.49,4370.75 1429.25,4370.75 1459.25,4340.75 ; 1459.25,4339.8 1568.15,4230.91 4351.2,4230.91 4431.59,4150.51 6288.45,4150.51 6366.96,4072.01 6947.99,4072.01 7081.14,3938.86 7298.86,3938.86 7430.51,4070.51 7988.29,4070.51 8202.78,4285 2.15@8425,4285
  Bottom Layer w30: v1(1129.49,4372.24) v1(1129.49,4612.01)
"LED GND 33": 3.28 Q33.1 | length 801.8
  Top Layer w30: Q33.1@7664.76,3624.76 8039.41,3624.76 8084.64,3670 8165.36,3670 8220.36,3615 3.28@8425,3615
"LED GND 34": 3.1 Q34.1 | length 1828.1
  Top Layer w30: Q34.1@6680.51,3627.76 v1(7035,3627.76) ; v1@7035,3385 7333.82,3385 7394.05,3324.76 7837.87,3324.76 3.1@8125,3611.9
  Bottom Layer w30: v1(7035,3387.99) v1(7035,3627.76)
"LED GND 35": 3.2 Q35.1 | length 2805.4
  Top Layer w30: Q35.1@5696.26,3627.76 v1(6050.75,3627.76) ; v1@6050.75,3385 6349.57,3385 6449.8,3284.76 7894.76,3284.76 3.2@8125,3515
  Bottom Layer w30: v1(6050.75,3387.99) v1(6050.75,3627.76)
"LED GND 36": 3.3 Q36.1 | length 3924.1
  Top Layer w30: Q36.1@4712.01,3627.76 v1(5066.5,3627.76) ; v1@5066.5,3385 5365.31,3385 5425.31,3325 5625.84,3325 5627.49,3326.65 6351.34,3326.65 6603.52,3074.48 6716.14,3074.48 6716.66,3075 7628.74,3075 7629.13,3074.61 7784.61,3074.61 3.3@8125,3415
  Bottom Layer w30: v1(5066.5,3387.99) v1(5066.5,3627.76)
"LED GND 37": 3.4 Q37.1 | length 4901.4
  Top Layer w30: Q37.1@3727.76,3627.76 v1(4082.24,3627.76) ; v1@4082.24,3385 4381.06,3385 4481.06,3285 4658.28,3285 4659.81,3286.53 4764.21,3286.53 4765.74,3285 5642.41,3285 5644.06,3286.65 6334.77,3286.65 6586.95,3034.48 6732.71,3034.48 6733.23,3035 7612.17,3035 7612.56,3034.61 7844.61,3034.61 3.4@8125,3315
  Bottom Layer w30: v1(4082.24,3387.99) v1(4082.24,3627.76)
"LED GND 38": 3.5 Q38.1 | length 5878.7
  Top Layer w30: Q38.1@2743.5,3627.76 v1(3097.99,3627.76) ; v1@3097.99,3385 3395,3385 3535,3245 3690.47,3245 3692.12,3246.65 3763.39,3246.65 3765.04,3245 4674.85,3245 4676.38,3246.53 4747.64,3246.53 4749.17,3245 5658.97,3245 5660.63,3246.65 6318.21,3246.65 6570.38,2994.48 6749.28,2994.48 6749.8,2995 7595.6,2995 7595.99,2994.61 7904.61,2994.61 3.5@8125,3215
  Bottom Layer w30: v1(3097.99,3387.99) v1(3097.99,3627.76)
"LED GND 39": 3.6 Q39.1 | length 6850.5
  Top Layer w30: Q39.1@1759.25,3627.76 v1(2113.74,3627.76) ; v1@2113.74,3385 2405,3385 2465.24,3324.76 2514.21,3324.76 ; 2514.45,3325 3395,3325 3655,3065 6443.29,3065 6553.81,2954.48 6765.85,2954.48 6766.37,2955 7579.03,2955 7579.43,2954.61 7926.47,2954.61 8086.86,3115 3.6@8125,3115
  Bottom Layer w30: v1(2113.74,3387.99) v1(2113.74,3627.76)
"LED GND 40": 3.7 Q40.1 | length 7826.8
  Top Layer w30: Q40.1@775,3627.76 v1(1129.49,3627.76) ; v1@1129.49,3385 1425,3385 1525.24,3284.76 2530.78,3284.76 2531.02,3285 3375,3285 3635,3025 6425,3025 6535.52,2914.48 6782.42,2914.48 6782.94,2915 7562.46,2915 7562.86,2914.61 7943.04,2914.61 8043.43,3015 3.7@8125,3015
  Bottom Layer w30: v1(1129.49,3387.99) v1(1129.49,3627.76)
"LED GND 41": 3.8 Q41.1 | length 561.9
  Top Layer w30: Q41.1@7669.76,2645.51 7735.51,2645.51 8001.49,2911.49 3.8@8121.49,2911.49
"LED GND 42": 3.9 Q42.1 | length 2005.3
  Top Layer w30: Q42.1@6680.51,2643.5 v1(7035,2643.5) ; v1@7035,2400.75 7333.82,2400.75 7394.05,2340.51 7820.51,2340.51 7925,2445 7925,2615 3.9@8125,2815
  Bottom Layer w30: v1(7035,2403.74) v1(7035,2643.5)
"LED GND 43": 3.10 Q43.1 | length 2957.9
  Top Layer w30: Q43.1@5696.26,2643.5 v1(6050.75,2643.5) ; v1@6050.75,2400.75 6349.57,2400.75 6449.8,2300.51 7840.51,2300.51 7965,2425 7965,2555 3.10@8125,2715
  Bottom Layer w30: v1(6050.75,2403.74) v1(6050.75,2643.5)
"LED GND 44": 3.11 Q44.1 | length 3910.4
  Top Layer w30: Q44.1@4712.01,2643.5 v1(5066.5,2643.5) ; v1@5066.5,2400.75 5365.31,2400.75 5425.55,2340.51 6353.23,2340.51 6433.23,2260.51 7860.51,2260.51 8005,2405 8005,2495 3.11@8125,2615
  Bottom Layer w30: v1(5066.5,2403.74) v1(5066.5,2643.5)